# EAGLE board water level (EAGLE 9.6.2)
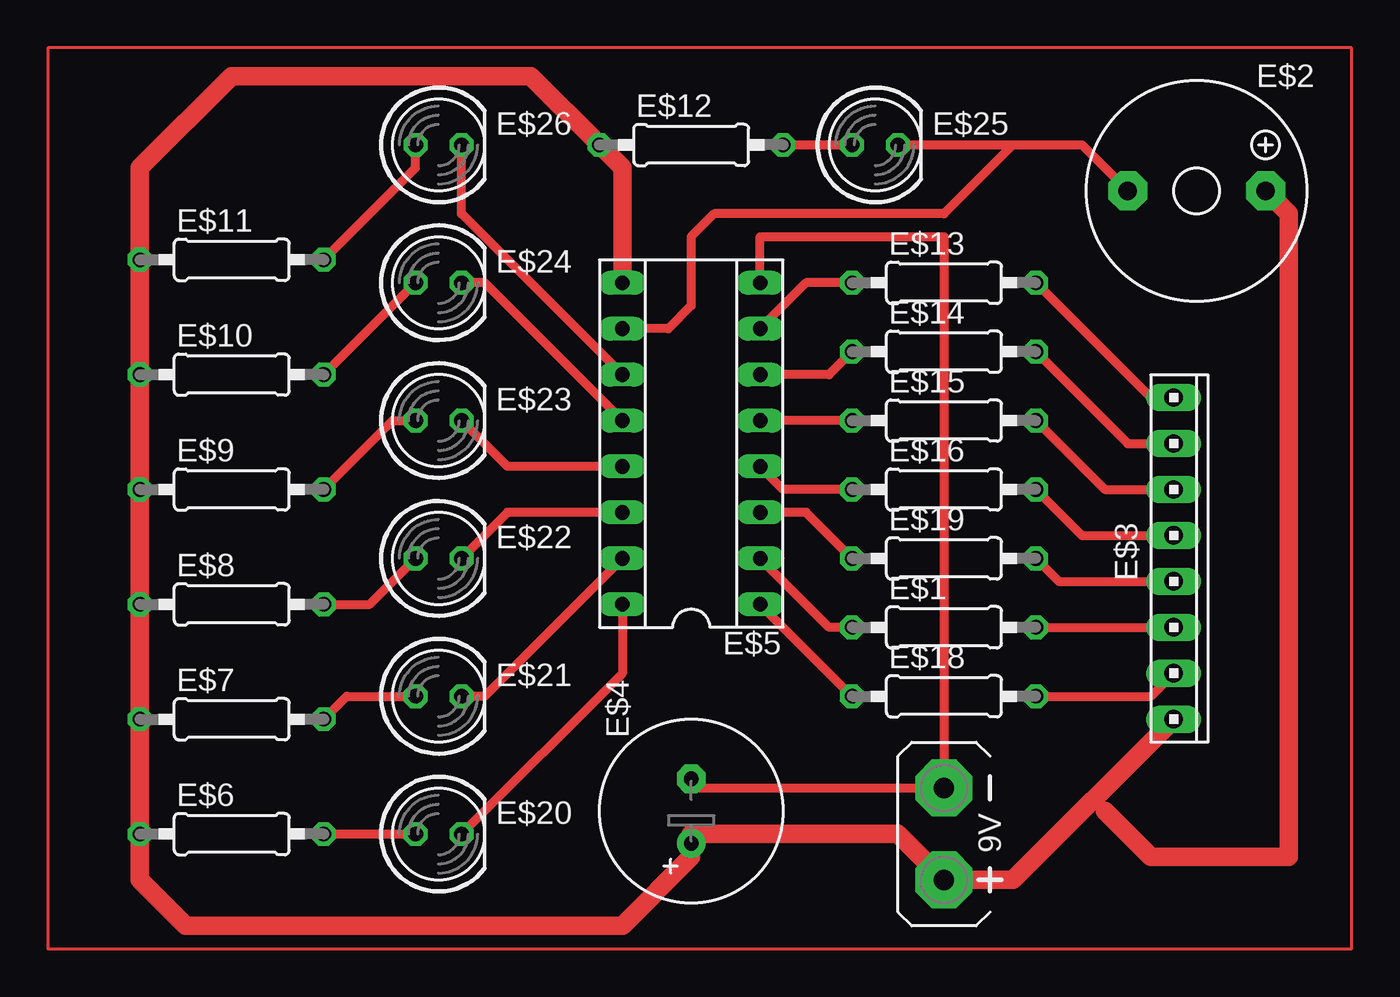
[diagram p0: board, top side]

No outline drawn. Coordinates in mm, seen from the top.
Copper layers (1*16): Top 0.035mm / dielectric 1.5mm / Bottom 0.035mm
Design rules "default": minimum track width 6mil, minimum drill 0.35mm, track to track 6mil, track to pad 6mil, pad to pad 6mil, via to via 6mil, smd to smd 6mil, copper to edge 40mil, drill to drill 6mil, minimum pad ring 10mil, minimum via ring 8mil, stop-mask expansion 4mil, vias tented up to drill 0mil, thermal gap 10mil

## Footprints (pad centres in the part's own frame; a part is rotated, then mirrored left to right if it is on the bottom)
0207/10 = drill 0.813 octagon: 1 -5.08,0; 2 5.08,0
F/TMB = drill 1.016 pad 2.159 octagon: + 3.81,0; - -3.81,0
10X08MTA = drill 1.016 long: 1 8.89,0; 2 6.35,0; 3 3.81,0; 4 1.27,0; 5 -1.27,0; 6 -3.81,0; 7 -6.35,0; 8 -8.89,0
E3,5-10 = drill 0.813 pad 1.6: + -1.778,0 | drill 0.813 pad 1.6 octagon: - 1.778,0
SOCKET-16 = drill 0.813 long: 1 -8.89,-3.81; 2 -6.35,-3.81; 3 -3.81,-3.81; 4 -1.27,-3.81; 5 1.27,-3.81; 6 3.81,-3.81; 7 6.35,-3.81; 8 8.89,-3.81; 9 8.89,3.81; 10 6.35,3.81; 11 3.81,3.81; 12 1.27,3.81; 13 -1.27,3.81; 14 -3.81,3.81; 15 -6.35,3.81; 16 -8.89,3.81
AB9V = drill 1.118 pad 3.15 octagon: + 0,2.54; - 0,-2.54
LED5MM = drill 0.813 octagon: A -1.27,0; K 1.27,0

## Placement (x,y rotation side)
E$1  [0207/10]  49.53,17.78 0 top
E$2  [F/TMB]  63.5,41.91 0 top
E$3  [10X08MTA]  62.23,21.59 270 top
E$4  [E3,5-10]  35.56,7.62 90 top
E$5  [SOCKET-16]  35.56,27.94 90 top
E$6  [0207/10]  10.16,6.35 0 top
E$7  [0207/10]  10.16,12.7 0 top
E$8  [0207/10]  10.16,19.05 0 top
E$9  [0207/10]  10.16,25.4 0 top
E$10  [0207/10]  10.16,31.75 0 top
E$11  [0207/10]  10.16,38.1 0 top
E$12  [0207/10]  35.56,44.45 0 top
E$13  [0207/10]  49.53,36.83 0 top
E$14  [0207/10]  49.53,33.02 0 top
E$15  [0207/10]  49.53,29.21 0 top
E$16  [0207/10]  49.53,25.4 0 top
E$17  [AB9V]  49.53,6.35 180 top
E$18  [0207/10]  49.53,13.97 0 top
E$19  [0207/10]  49.53,21.59 0 top
E$20  [LED5MM]  21.59,6.35 0 top
E$21  [LED5MM]  21.59,13.97 0 top
E$22  [LED5MM]  21.59,21.59 0 top
E$23  [LED5MM]  21.59,29.21 0 top
E$24  [LED5MM]  21.59,36.83 0 top
E$25  [LED5MM]  45.72,44.45 0 top
E$26  [LED5MM]  21.59,44.45 0 top

## Library data of the parts
E$1 E$4 E$6-E$16 E$18 E$19 = rcl
E$2 = buzzer
E$3 = con-amp
E$5 = ic-package
E$17 = battery
E$20-E$26 = led

## Nets
S$2: E$2.+
S$4: E$3.8 E$13.2
S$5: E$3.7 E$14.2
S$6: E$3.6 E$15.2
S$7: E$3.5 E$16.2
S$8: E$3.4 E$19.2
S$9: E$1.2 E$3.3
S$10: E$3.2 E$18.2
S$11: E$5.7 E$13.1
S$12: E$5.6 E$14.1
S$13: E$5.5 E$15.1
S$14: E$5.4 E$16.1
S$15: E$5.3 E$19.1
S$16: E$1.1 E$5.2
S$17: E$5.1 E$18.1
S$18: E$5.16 E$20.K
S$19: E$5.15 E$21.K
S$20: E$5.14 E$22.K
S$21: E$3.1 E$5.9 E$6.1 E$7.1 E$8.1 E$9.1 E$10.1 E$11.1 E$12.1 E$17.+
S$22: E$5.13 E$23.K
S$23: E$5.12 E$24.K
S$24: E$6.2 E$20.A
S$25: E$7.2 E$21.A
S$26: E$8.2 E$22.A
S$27: E$9.2 E$23.A
S$28: E$10.2 E$24.A
S$29: E$11.2 E$26.A
S$30: E$5.11 E$26.K
S$31: E$12.2 E$25.A
S$32: E$2.- E$5.10 E$25.K
S$33: E$5.8 E$17.-

## Tracks (layer width: path | path; a pad name or v marks a point on that pad's centre or on a via)
S$1
  Top 0.152: 0,0 72.06,0 72.06,49.81 0,49.81 0,0
S$2
  Top 1.016: E$2.+ 68.58,40.64 68.58,5.08 60.96,5.08 58.42,7.62
S$4
  Top 0.508: E$13.2 60.96,30.48 E$3.8
S$5
  Top 0.508: E$14.2 59.69,27.94 E$3.7
S$6
  Top 0.508: E$15.2 58.42,25.4 E$3.6
S$7
  Top 0.508: E$16.2 57.15,22.86 E$3.5
S$8
  Top 0.508: E$19.2 55.88,20.32 E$3.4
S$9
  Top 0.508: E$1.2 E$3.3
S$10
  Top 0.508: E$18.2 60.96,13.97 E$3.2
S$11
  Top 0.508: E$13.1 41.91,36.83 E$5.7
S$12
  Top 0.508: E$14.1 43.18,31.75 E$5.6
S$13
  Top 0.508: E$15.1 E$5.5
S$14
  Top 0.508: E$16.1 40.64,25.4 E$5.4
S$15
  Top 0.508: E$19.1 41.91,24.13 E$5.3
S$16
  Top 0.152: E$5.2 40.64,21.59
  Top 0.508: E$1.1 43.18,17.78 E$5.2
S$17
  Top 0.508: E$18.1 E$5.1
S$18
  Top 0.508: E$5.16 31.75,15.24 E$20.K
S$19
  Top 0.508: E$5.15 24.13,13.97 E$21.K
S$20
  Top 0.508: E$5.14 25.4,24.13 E$22.K
S$21
  Top 1.016: E$5.9 31.75,43.18 E$12.1 26.67,48.26 10.16,48.26 5.08,43.18 E$11.1 E$10.1 E$9.1 E$8.1 E$7.1 E$6.1 5.08,3.81 7.62,1.27 31.75,1.27 35.56,5.08 35.56,6.35 46.99,6.35 E$17.+ 53.34,3.81 E$3.1
S$22
  Top 0.508: E$5.13 25.4,26.67 E$23.K
S$23
  Top 0.508: E$5.12 24.13,36.83 E$24.K
S$24
  Top 0.508: E$6.2 E$20.A
S$25
  Top 0.508: E$7.2 16.51,13.97 E$21.A
S$26
  Top 0.508: E$8.2 17.78,19.05 E$22.A
S$27
  Top 0.508: E$9.2 19.05,29.21 E$23.A
S$28
  Top 0.508: E$10.2 E$24.A
S$29
  Top 0.508: E$11.2 20.32,43.18 E$26.A
S$30
  Top 0.508: E$26.K 22.86,40.64 E$5.11
S$31
  Top 0.508: E$12.2 E$25.A
S$32
  Top 0.508: E$25.K 53.34,44.45 | 53.34,44.45 57.15,44.45 E$2.- | 53.34,44.45 49.53,40.64 36.83,40.64 35.56,39.37 35.56,35.56 34.29,34.29 E$5.10
S$33
  Top 0.508: E$5.8 39.37,39.37 49.53,39.37 E$17.- 35.56,8.89